# Altium PCB CAN_OD节点V11.PcbDoc
Units mil, origin at the board's own origin, x right, y up, seen from the top; angles counter-clockwise.
Board outline 1045.03 x 910.03 mil, 2 copper layers (Top Layer, Bottom Layer); 34 components, 61 nets, 149 pads, 32 vias.
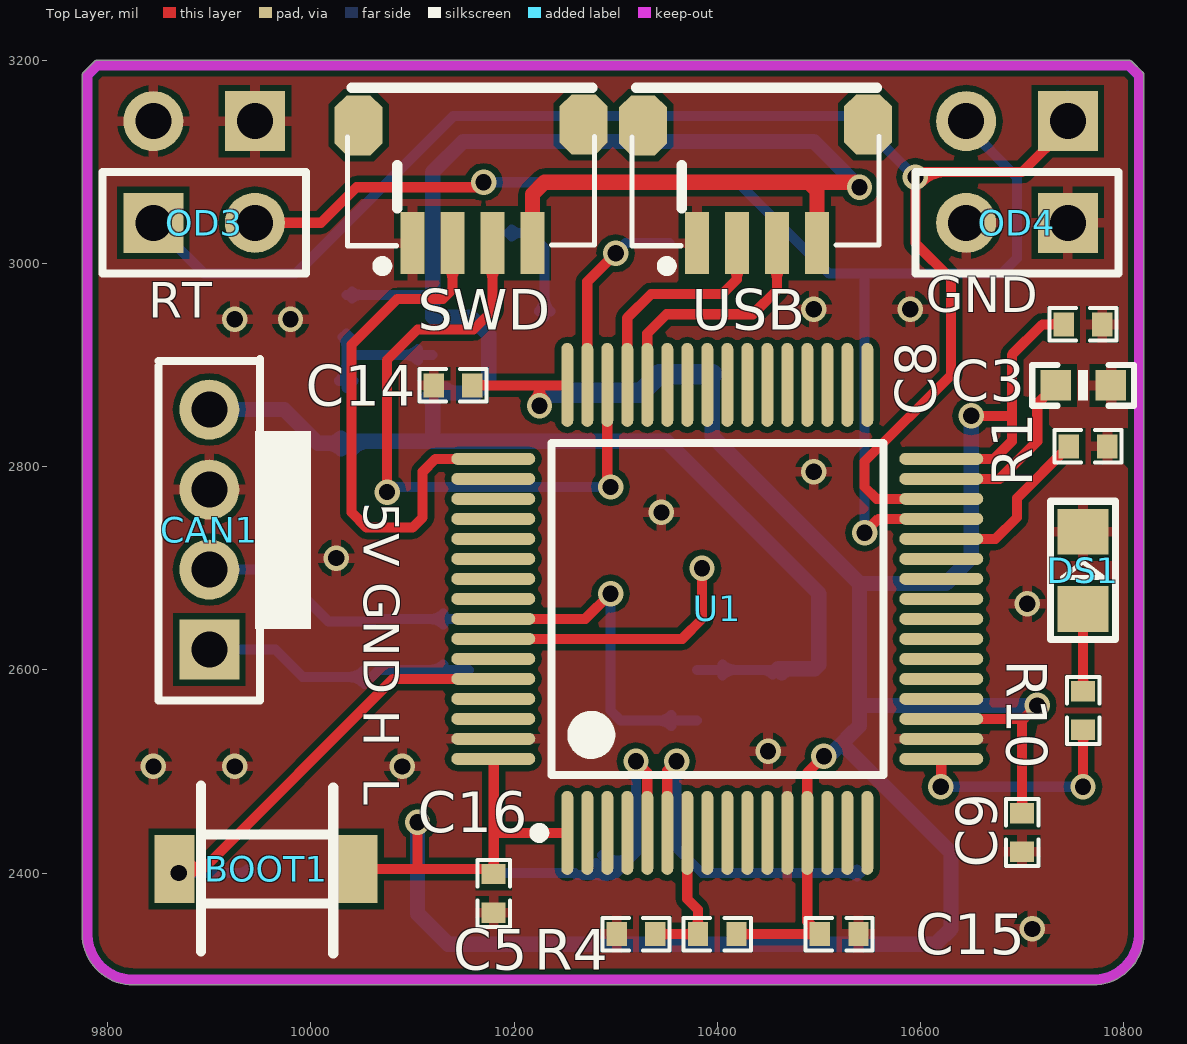
[diagram p0: Top Layer view]
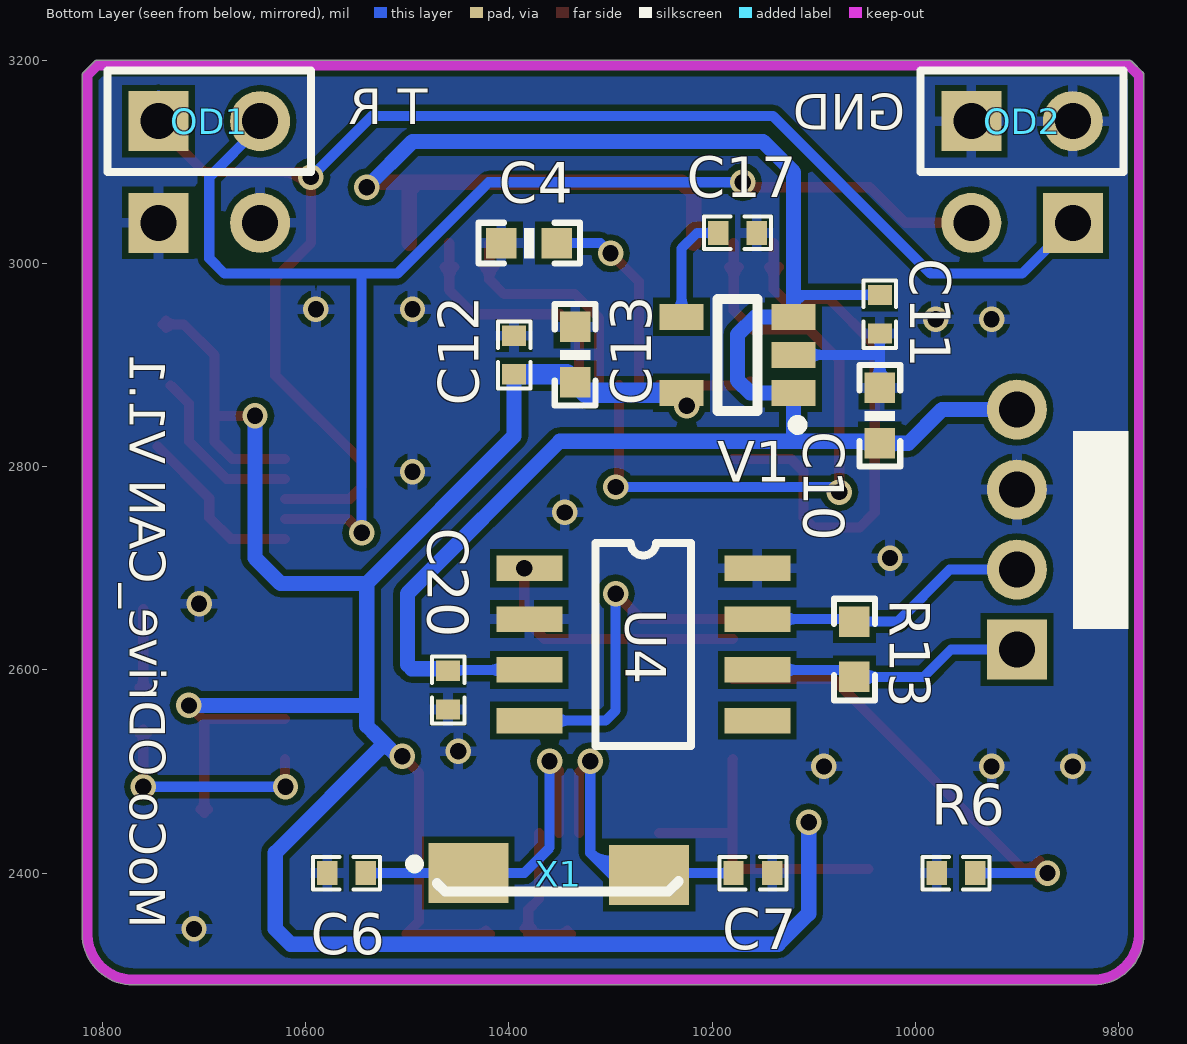
[diagram p1: Bottom Layer view, seen from below]
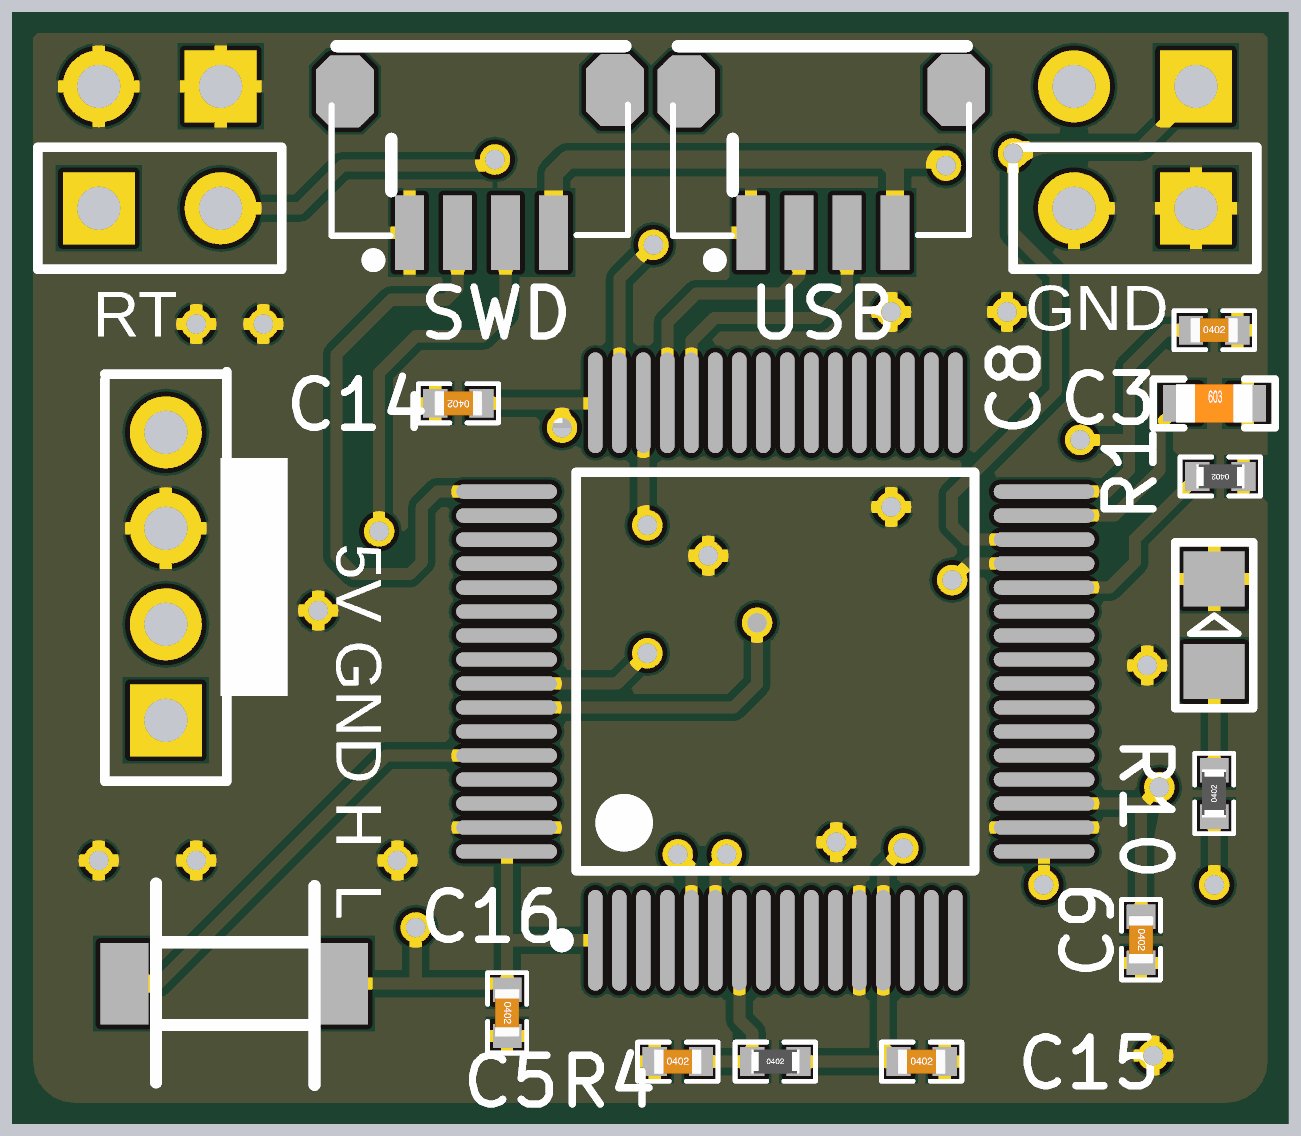
[diagram p2: 3D render of the assembled board from above, using the file's embedded part models]
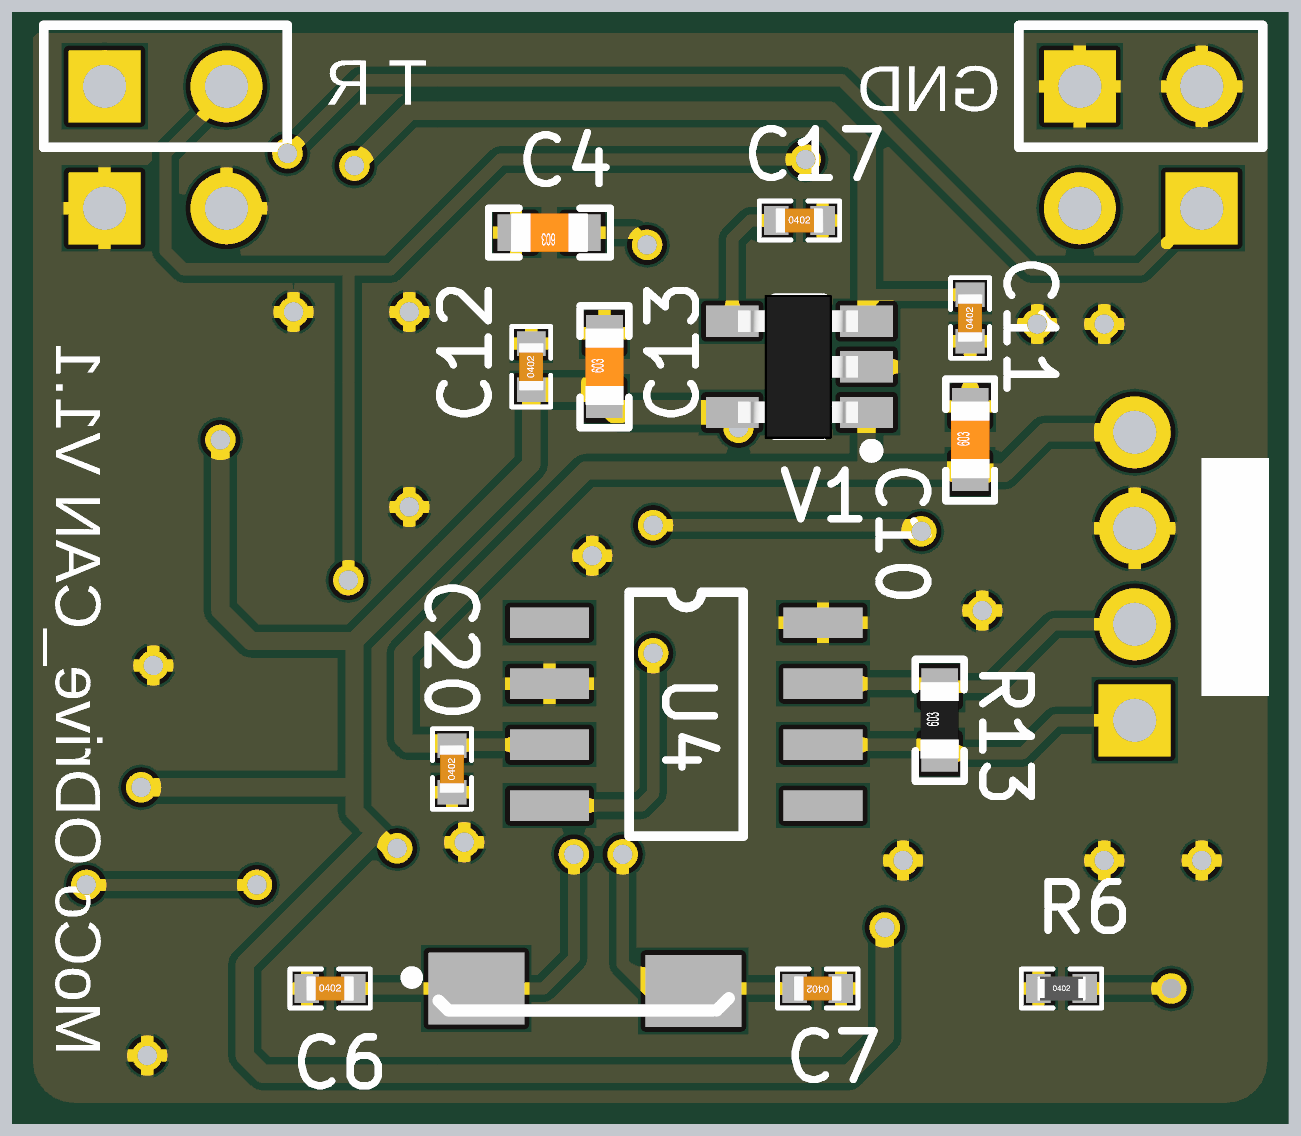
[diagram p3: 3D render of the assembled board from below, using the file's embedded part models]

## Layer stack, top to bottom
Top Layer: signal copper 1.4
Dielectric: dielectric 12.6, FR-4, Dk 4.8
Bottom Layer: signal copper 1.4

## Board outline
9774.99,2340 9774.99,3185 cw(c9780,3185) 9776.47,3188.56 9776.45,3188.55 9786.45,3198.55 9786.44,3198.53 cw(c9790,3195) 9790,3200.01 10805,3200.01 cw(c10805,3195) 10808.56,3198.53 10808.55,3198.55 10818.55,3188.55 10818.53,3188.56 cw(c10815,3185) 10820.01,3185 10820.01,2340 cw(c10770,2340) 10770,2289.99 9825,2289.99 cw(c9825,2340)

## Design rules (kind name [scope] priority, off if disabled: settings)
Clearance [All] p1: gap=6
PolygonConnect [All] p1: connectstyle=Relief reliefconductorwidth=10 reliefentries=4 polygonreliefangle="90 Angle"
RoutingVias [All] p1: holewidth=28 width=50 viastyle="Through Hole" minholewidth=16 minwidth=25 maxholewidth=28 maxwidth=50
SilkscreenOverComponentPads [All] p1: minsilkscreentomaskgap=10
SolderMaskExpansion [All] p1: expansion=4
Width [All] p1: maxlimit=30 minlimit=10 preferedwidth=10 minimp=50.000000 maximp=50.000000 favimp=50.000000
27 further rules are at their usual default settings.

## Components (designator, comment, footprint, x,y, rotation, side; value= is the part's Value field where it differs from the comment)
BOOT1 "Header 2" 663*4*2.0/2.5mm 9920,2420 r0 top
C3 "2.2UF" C0603 10760,2880 r0 top
C4 "2.2UF" C0603 10380,3020 r0 bottom
C5 "10NF" "C 0402" 10320,2340 r0 top
C6 "20PF" "C 0402" 10560,2400 r180 bottom
C7 "20PF" "C 0402" 10160,2400 r0 bottom
C8 "0.1UF" "C 0402" 10760,2940 r0 top
C9 "0.1UF" "C 0402" 10700,2440 r270 top
C10 "10uF" C0603 10035,2850 r90 bottom
C11 "0.1uF" "C 0402" 10035,2950 r90 bottom
C12 "0.1uF" "C 0402" 10395,2910 r90 bottom
C13 "10uF" C0603 10335,2910 r90 bottom
C14 "0.1UF" "C 0402" 10140,2880 r180 top
C15 "0.1UF" "C 0402" 10520,2340 r0 top
C16 "0.1UF" "C 0402" 10180,2380 r270 top
C17 "0.1uF" "C 0402" 10175,3030 r180 bottom
C20 "0.1UF" "C 0402" 10460,2580 r90 bottom
CAN1 "Header 4" PH2.0-4 9900,2620 r90 top
DS1 "LED1" SMDLED 10760,2660 r90 top
OD1 "Header 2" HDR1X2 10745,3140 r180 bottom
OD2 "Header 2" HDR1X2 9945,3140 r180 bottom
OD3 "Header 2" HDR1X2 9845,3040 r0 top
OD4 "Header 2" HDR1X2 10745,3040 r180 top
R1 "10K" "R 0402" 10765,2820 r180 top
R4 "10K" "R 0402" 10400,2340 r0 top
R6 "10K" "R 0402" 9960,2400 r180 bottom
R10 "100R" "R 0402" 10760,2560 r90 top
R13 "120R" R0603 10060,2620 r90 bottom
SWD "Header 4" "SH1.0-4P - up" 10100,3020 r0 top (schematic designator SWD1)
U1 "STM32F405RGT6" LQFP64_M 10400,2660 r90 top
U4 "TJA1050" SOP-8 10380,2700 r180 bottom
USB "Header 4" "SH1.0-4P - up" 10380,3020 r0 top (schematic designator USB_L1)
V1 "RT9193-3.3/LP2985/SPX3819" SOT23-5 10175,2910 r180 bottom
X1 "8MHZ" PXCL 10440,2400 r270 bottom

## Footprints (in the part's own frame and the unit in brackets; to place one, negate y for a bottom-side part, rotate by r counter-clockwise, add the part's x,y. Pads: shape width x height; smd on the part's side, far side on the other; paste and mask are expansions set on the pad)
663*4*2.0/2.5mm [mil] "小龟按键"
  rect 39.37x66.93 smd: 1(126,-16) 2(-54,-16)
  silkscreen extent -28,-99 102,66
C0603 [mil]
  rect 30x30 smd: 1(-27,0) 2(27.5,-0.06)
  silkscreen extent -50,-20 50,20, body extent -31,-16 31,16, height 12
"C 0402" [mil]
  rect 20x23.62 smd: 1(-19,0) 2(19,0)
  silkscreen extent -33,-16 33,16, body extent -20,-10 20,10, height 20
HDR1X2 [mm] "Connector; Header; 2 Position"
  rect 1.5x1.5 hole 0.9: 1(0,0)
  round 1.5 hole 0.9: 2(2.54,0)
  silkscreen extent -1.27,-1.27 3.81,1.27
LQFP64_M [mm] "Thin QFP, 64-Leads, Body 10x10mm, Pitch 0.5mm, IPC Low Density"
  oval 2.1x0.3 smd: 1(-5.6,3.75) 2(-5.6,3.25) 3(-5.6,2.75) 4(-5.6,2.25) 5(-5.6,1.75) 6(-5.6,1.25) 7(-5.6,0.75) 8(-5.6,0.25) 9(-5.6,-0.25) 10(-5.6,-0.75) 11(-5.6,-1.25) 12(-5.6,-1.75) 13(-5.6,-2.25) 14(-5.6,-2.75) 15(-5.6,-3.25) 16(-5.6,-3.75) 33(5.6,-3.75) 34(5.6,-3.25) 35(5.6,-2.75) 36(5.6,-2.25) 37(5.6,-1.75) 38(5.6,-1.25) 39(5.6,-0.75) 40(5.6,-0.25) 41(5.6,0.25) 42(5.6,0.75) 43(5.6,1.25) 44(5.6,1.75) 45(5.6,2.25) 46(5.6,2.75) 47(5.6,3.25) 48(5.6,3.75)
  oval 0.3x2.1 smd: 17(-3.75,-5.6) 18(-3.25,-5.6) 19(-2.75,-5.6) 20(-2.25,-5.6) 21(-1.75,-5.6) 22(-1.25,-5.6) 23(-0.75,-5.6) 24(-0.25,-5.6) 25(0.25,-5.6) 26(0.75,-5.6) 27(1.25,-5.6) 28(1.75,-5.6) 29(2.25,-5.6) 30(2.75,-5.6) 31(3.25,-5.6) 32(3.75,-5.6) 49(3.75,5.6) 50(3.25,5.6) 51(2.75,5.6) 52(2.25,5.6) 53(1.75,5.6) 54(1.25,5.6) 55(0.75,5.6) 56(0.25,5.6) 57(-0.25,5.6) 58(-0.75,5.6) 59(-1.25,5.6) 60(-1.75,5.6) 61(-2.25,5.6) 62(-2.75,5.6) 63(-3.25,5.6) 64(-3.75,5.6)
  silkscreen extent -5.72,-4.15 4.15,4.57, body extent -5,-5 5,5, height 1.6
PH2.0-4 [mm]
  rect 1.5x1.5 hole 0.9: 1(0,0)
  round 1.5 hole 0.9: 2(2,0) 3(4,0) 4(6,0)
  silkscreen extent -1.27,-1.27 7.26,1.27
PXCL [mm]
  rect 1.5x2 smd: 1(0,0) 2(0.051,4.521)
  silkscreen extent -0.34,-1.45 0.46,5.26
R0603 [mil]
  rect 30x30 smd: 1(-27,0) 2(27.5,-0.06)
  silkscreen extent -50,-20 50,20, body extent -31,-16 31,16, height 12
"R 0402" [mil]
  rect 20x23.62 smd: 1(-19,0) 2(19,0)
  silkscreen extent -33,-16 33,16, body extent -20,-10 20,10, height 12
"SH1.0-4P - up" [mm]
  rect 0.6x1.55 smd: 1(0,0) 2(1,0) 3(2,0) 4(3,0)
  oct 1.2x1.5 smd: 1.(4.279,2.972) A(-1.346,2.946)
  silkscreen extent -1.63,-0.7 4.55,3.89
SMDLED [mil]
  rect 45x50 smd: 1(0,0) 2(76.01,0)
  silkscreen extent -30,-32 106,32
SOP-8 [mil]
  rect 65x25 smd: 1(0,0) 2(0,-50) 3(0,-100) 4(0,-150) 5(224.41,-150) 6(224.41,-100) 7(224.41,-50) 8(224.41,0)
  silkscreen extent 65,-175 159,25
SOT23-5 [mm]
  rect 1.1x0.65 smd: 1(1.4,-0.95) 2(1.4,0) 3(1.4,0.95) 4(-1.4,0.95) 5(-1.4,-0.95)
  silkscreen extent -0.5,-1.87 1.62,1.4, body extent -1.28,-1.5 1.22,1.5, height 1.05

## Part data
BOOT1 OD1 OD2 OD3 OD4: "Header, 2-Pin"
C3 C4: library part CAP1, "胆电容"
C5 C8 C9 C10 C12 C13 C14 C15 C16 C20: library part CAP, "Capacitor"
C6 C7: library part C2, "0805"
C11 C17: library part Capacitor, "普通电容"
CAN1 SWD USB: "Header, 4-Pin"
DS1: library part LED2, "Typical RED, GREEN, YELLOW, AMBER GaAs LED"
R1 R4 R6 R10 R13: library part Res2, "0603"
U4: library part SN65HVD230D
V1: "降压IC"
X1: library part XTAL, "Crystal Oscillator"

## Via types
v1: diameter 25, hole 16, Top Layer to Bottom Layer, 32 vias

## Nets (pads, with @x,y where several pads share a name; then routed paths per layer and width w, separated by ;. In a path a pad name is that pad's centre, name@x,y a point inside that pad or via, vN(x,y) a via of type N, cw(c..) or ccw(c..) an arc to the next point about the centre after c; other vN are vias at no path point)
3.3V: BOOT1.1 C8.1 C9.1 C12.1 C13.1 C14.1 C15.1 C16.1 R4.2 U1.1 U1.13 U1.19 U1.32 U1.48 U1.64 V1.5 | length 3281.5
  Top Layer w10: BOOT1.1 10105,2404 ; v1(10105,2450) 10105,2404 ; C14.1 10225,2880 ; C14.1@10162.54,2876.46 cw(c10171.07,2867.93) 10171.07,2880 cw(c10171.07,2892.07) C14.1@10162.54,2883.54 ; C16.1@10176.46,2402.54 ccw(c10167.93,2411.07) 10180,2411.07 ccw(c10192.07,2411.07) C16.1@10183.54,2402.54 ; U1.64 10180,2511.89 10180,2440 ; v1@10219.7,2865.3 ccw(c10206.89,2878.11) 10225,2878.11 ccw(c10243.11,2878.11) v1@10230.3,2865.3 ; v1(10225,2860) 10225,2880 ; U1.1 10180.47,2439.53 10180,2440 ; U1.48 10251.89,2880 10225,2880 ; R4.2 C15.1 10488.58,2352.42 U1.13 10488.58,2498.58 v1(10505,2515) ; R4.2@10422.54,2336.46 cw(c10431.07,2327.93) 10431.07,2340 cw(c10431.07,2352.07) R4.2@10422.54,2343.54 ; C15.1@10497.46,2336.46 ccw(c10488.93,2327.93) 10488.93,2340 ccw(c10488.93,2352.07) C15.1@10497.46,2343.54 ; U1.19 10701.73,2551.73 ; U1.32 10672.64,2807.64 10690,2825 10690,2850 ; v1(10650,2850) 10690,2850 ; C9.1@10696.46,2462.54 ccw(c10687.93,2471.07) 10700,2471.07 ccw(c10712.07,2471.07) C9.1@10703.54,2462.54 ; C9.1 10700,2550 10701.73,2551.73 ; v1(10715,2565) 10701.73,2551.73 ; C8.1@10737.46,2936.46 ccw(c10728.93,2927.93) 10728.93,2940 ccw(c10728.93,2952.07) C8.1@10737.46,2943.54 ; C8.1 10720,2940 10690,2910 10690,2850 ; 10105,2404 10175,2404 C16.1 10180,2440
  Bottom Layer w10: v1(10225,2860) V1.5@10225,2867.48
  Bottom Layer w15: v1(10105,2450) 10105,2360 10135,2330 10615,2330 10630,2345 10630,2420 10522.5,2527.5 ; C12.1 10395,2830 10540,2685 ; v1(10505,2515) 10510,2515 10522.5,2527.5 ; 10530.22,2534.78 10530.22,2535.22 ; v1(10650,2850) 10650,2710 10625,2685 10540,2685 ; v1(10715,2565) 10540,2565 ; 10522.5,2527.5 10530.22,2535.22 ; 10530.22,2535.22 10540,2545 10540,2565 ; 10540,2565 10540,2685
  Bottom Layer w20: V1.5 10324.6,2872.6 10343,2891 C12.1
5V: C10.1 C11.2 C20.2 CAN1.4 SWD.4 U4.3 USB.4 V1.1 V1.3 | length 2352
  Top Layer w15: SWD.4 10218.11,3068.11 10230,3080 10490,3080 ; USB.4 10498.11,3071.89 10490,3080 ; v1(10540,3075) 10535,3080 10490,3080
  Bottom Layer w10: C11.2 10111,2969 10119.88,2960.12 V1.3 ; C11.2@10040.35,2965.46 cw(c10048.88,2956.93) 10048.88,2969 cw(c10048.88,2981.07) C11.2@10040.35,2972.54 ; U4.3 10459,2600 C20.2@10460,2601 ; U4.3@10405.3,2594.7 cw(c10418.11,2581.89) 10418.11,2600 cw(c10418.11,2618.11) U4.3@10405.3,2605.3 ; 10443.7,2600 cw(c10443.7,2584.51) C20.2@10454.65,2595.46
  Bottom Layer w15: CAN1.4 9973.78,2856.22 10007,2823 C10.1 10037,2825 10120,2825 ; C10.1@10029.7,2817.7 ccw(c10016.89,2804.89) 10016.89,2823 ccw(c10016.89,2841.11) C10.1@10029.7,2828.3 ; C10.1@10040.3,2817.7 cw(c10057.93,2800.07) 10057.93,2825 ; V1.1@10116.14,2868.85 cw(c10106.81,2859.53) 10120,2859.53 ; V1.1 V1.1@10120,2872.48 ; V1.1@10132.48,2876.34 ccw(c10141.81,2885.67) 10141.81,2872.48 ; C20.2@10460,2601 10496,2601 ; C20.2@10463.58,2597.23 cw(c10472.67,2588.14) 10472.67,2601 ; 10500,2605 10500,2675 10350,2825 10120,2825 ; v1(10540,3075) 10495,3120 10150,3120 10119.88,3089.88 V1.3 10157.6,2947.4 10175,2930 10175,2885 10162.48,2872.48 V1.1@10120,2872.48 ; 10120,2825 V1.1@10120,2872.48
BAT: U1.20
BEEP: U1.59
CAN_RX1: U1.61
CAN_RX2: U1.57 U4.4 | length 358.3
  Top Layer w10: U1.57 10270.16,2650.16 v1(10295,2675)
  Bottom Layer w10: v1(10295,2675) 10295,2560 10305,2550 U4.4 ; U4.4@10354.7,2544.7 ccw(c10341.89,2531.89) 10341.89,2550 ccw(c10341.89,2568.11) U4.4@10354.7,2555.3
CAN_TX1: U1.62
CAN_TX2: U1.58 U4.1 | length 263.6
  Top Layer w10: U1.58 10365.47,2630.47 10385,2650 v1(10385,2700)
CS_BARO: U1.33
CS_FLASH: U1.41
CS_HML: U1.50
CS_IMU: U1.21
CS_NRF: U1.24
DM: U1.44 USB.3 | length 268
  Top Layer w10: U1.44 10331.1,2931.1 10350,2950 10435,2950 10458.74,2973.74 USB.3 ; USB.3@10453.92,2996.48 cw(c10442.3,2984.86) 10458.74,2984.86 cw(c10475.18,2984.86) USB.3@10463.56,2996.48
DP: U1.45 USB.2 | length 251.1
  Top Layer w10: U1.45 10311.42,2946.42 10335,2970 10405,2970 10419.37,2984.37 USB.2 ; USB.2@10414.55,2996.48 cw(c10402.93,2984.86) 10419.37,2984.86 cw(c10435.81,2984.86) USB.2@10424.19,2996.48
EN_POWER: U1.25
GND: C3.2 C4.2 C5.1 C6.1 C7.1 C8.2 C9.2 C10.2 C11.1 C12.2 C13.2 C14.2 C15.2 C16.2 C17.2 C20.1 CAN1.3 DS1.2 OD2.1 OD2.2 OD4.1 OD4.2 R1.1 R6.1 SWD.1 U1.12 U1.18 U1.63 U4.2 U4.8 USB.1 V1.2 | length 224.9
  Bottom Layer w10: C10.2@10027.86,2884.57 ccw(c10010.64,2901.8) 10035,2901.8 ; C11.1@10031.46,2927.46 cw(c10022.93,2918.93) 10035,2918.93 cw(c10047.07,2918.93) C11.1@10038.54,2927.46 ; C10.2 10035,2877.56 C11.1 ; 10035,2901.49 ccw(c10058.92,2901.49) C10.2@10042.01,2884.57 ; 10035,2910 V1.2 ; V1.2@10105.51,2904.49 ccw(c10092.2,2891.18) 10092.2,2910 ccw(c10092.2,2928.82) V1.2@10105.51,2915.51
  other v1: 10710,2345 9845,2505 9925,2505 10090,2505 10450,2520 10705,2665 10025,2710 10345,2755 10495,2795 9925,2945 9980,2945 10495,2955 10590,2955
GROUND1: U1.8
GROUND2: U1.9
GROUND3: U1.10
GROUND4: U1.11
LED1: R10.1 U1.17 | length 242.5
  Top Layer w10: v1(10620,2485) 10620.47,2485.47 U1.17 ; R10.1@10756.46,2537.46 cw(c10747.93,2528.93) 10760,2528.93 cw(c10772.07,2528.93) R10.1@10763.54,2537.46 ; v1(10760,2485) R10.1
  Bottom Layer w10: v1(10620,2485) v1(10760,2485)
LED2: U1.56
NetBOOT1_2: BOOT1.2 R6.2 U1.60 | length 544.8
  Top Layer w10: v1(9870,2400) BOOT1.2 9894,2404 ; BOOT1.2@9875.85,2395.3 cw(c9894,2380.71) 9894,2404 ; BOOT1.2@9878.08,2395.65 cw(c9894,2384.65) 9894,2404 ; BOOT1.2@9878.08,2412.35 ccw(c9894,2423.35) 9894,2404 ; U1.60 10081.1,2591.1 9894,2404
  Bottom Layer w10: v1(9870,2400) R6.2 ; R6.2@9937.46,2396.46 ccw(c9928.93,2387.93) 9928.93,2400 ccw(c9928.93,2412.07) R6.2@9937.46,2403.54
NetC3_1: C3.1 U1.31 | length 172.3
  Top Layer w10: U1.31 10677.95,2787.95 10715,2825 10715,2862 C3.1
NetC4_1: C4.1 U1.47 | length 198.2
  Top Layer w10: U1.47 10272.05,2982.05 v1(10300,3010)
  Bottom Layer w10: v1(10300,3010) 10310,3020 C4.1
NetC5_2: C5.2 R4.1 U1.7 | length 202.8
  Top Layer w10: C5.2 R4.1 10381,2364 10370.47,2374.53 U1.7 ; C5.2@10342.54,2336.46 cw(c10351.07,2327.93) 10351.07,2340 cw(c10351.07,2352.07) C5.2@10342.54,2343.54 ; R4.1@10377.46,2336.46 ccw(c10368.93,2327.93) 10368.93,2340 ccw(c10368.93,2352.07) R4.1@10377.46,2343.54 ; R4.1@10377.46,2345.35 ccw(c10368.93,2353.88) 10381,2353.88 ccw(c10393.07,2353.88) R4.1@10384.54,2345.35
NetC6_2: C6.2 U1.6 X1.1 | length 369.6
  Top Layer w10: U1.6 10350.79,2500.79 v1(10360,2510)
  Bottom Layer w10: v1(10360,2510) 10360,2425 10385,2400 X1.1 C6.2 ; C6.2@10537.46,2396.46 ccw(c10528.93,2387.93) 10528.93,2400 ccw(c10528.93,2412.07) C6.2@10537.46,2403.54
NetC7_2: C7.2 U1.5 X1.2 | length 437.6
  Top Layer w10: v1(10320,2510) 10331.1,2498.9 U1.5
  Bottom Layer w10: C7.2 10260,2400 X1.2 10298,2398 10320,2420 ; C7.2@10182.54,2396.46 cw(c10191.07,2387.93) 10191.07,2400 cw(c10191.07,2412.07) C7.2@10182.54,2403.54 ; X1.2@10274.56,2401.62 ccw(c10287.93,2419.45) 10303.69,2403.69 ; X1.2@10280.56,2409.62 ccw(c10294.92,2428.77) 10311.85,2411.85 ; X1.2@10286.56,2417.62 ccw(c10301.91,2438.09) 10320,2420 ; v1(10320,2510) 10320,2420
NetC17_1: C17.1 V1.4 | length 158.4
  Bottom Layer w10: C17.1 10215,3030 10230.12,3014.88 V1.4 ; C17.1@10197.54,3026.46 cw(c10206.07,3017.93) 10206.07,3030 cw(c10206.07,3042.07) C17.1@10197.54,3033.54 ; V1.4@10224.61,2952.91 ccw(c10211.3,2966.22) 10230.12,2966.22 ccw(c10248.94,2966.22) V1.4@10235.63,2952.91
NetCAN1_2: CAN1.1 R13.1 U4.6 | length 356.3
  Bottom Layer w10: CAN1.1 9965,2620 9992,2593 R13.1 ; R13.1@10052.69,2586.18 ccw(c10037,2571.55) 10037,2593 ; R13.1@10052.69,2599.82 cw(c10037,2614.45) 10037,2593 ; U4.6@10130.29,2594.7 ccw(c10117.48,2581.89) 10117.48,2600 ccw(c10117.48,2618.11) U4.6@10130.29,2605.3 ; U4.6 10067,2600 R13.1 ; 10037,2593 R13.1
NetCAN1_3: CAN1.2 R13.2 U4.7 | length 336.2
  Bottom Layer w10: CAN1.2 9966.26,2698.74 10017.5,2647.5 R13.2 ; 10029.98,2647.5 R13.2 ; U4.7@10130.29,2644.7 ccw(c10117.48,2631.89) 10117.48,2650 ccw(c10117.48,2668.11) U4.7@10130.29,2655.3 ; U4.7 10062.44,2650 R13.2
NetDS1_1: DS1.1 R10.2 | length 100
  Top Layer w10: R10.2@10756.46,2582.54 ccw(c10747.93,2591.07) 10760,2591.07 ccw(c10772.07,2591.07) R10.2@10763.54,2582.54 ; R10.2 DS1.1
NetR1_2: R1.2 U1.28 | length 174.4
  Top Layer w10: U1.28 10673.9,2728.9 10695,2750 10695,2769 R1.2
NRF_CE: U1.2
PWM1: U1.14
PWM2: U1.15
PWM3: U1.16
PWM5: U1.22
PWM6: U1.23
PWM7: U1.26
PWM8: U1.27
PWM9: U1.37
PWM10: U1.38
PWM11: U1.39
PWM12: U1.40
SBUS: U1.54
SCL_B: U1.3
SCLK_FC: SWD.2 U1.49 | length 558.5
  Top Layer w10: SWD.2@10134.55,2996.48 cw(c10122.93,2984.86) 10139.37,2984.86 cw(c10155.81,2984.86) SWD.2@10144.19,2996.48 ; SWD.2 10139.37,2974.37 10130,2965 10085,2965 10040,2920 10040,2755 10055,2740 10100,2740 10110,2750 10110,2795 10122.64,2807.64 U1.49
SDA_B: U1.4
SPI2_CK: U1.34
SPI2_SI: U1.36
SPI2_SO: U1.35
SPI3_CK: U1.51
SPI3_SI: U1.53
SPI3_SO: U1.52
SWD_FC: SWD.3 U1.46 | length 669.9
  Top Layer w10: v1(10075,2775) 10075,2905 10105,2935 10160,2935 10178.74,2953.74 SWD.3 ; SWD.3@10173.92,2996.48 cw(c10162.3,2984.86) 10178.74,2984.86 cw(c10195.18,2984.86) SWD.3@10183.56,2996.48 ; U1.46 10291.73,2783.27 v1(10295,2780)
  Bottom Layer w10: v1(10075,2775) 10080,2780 v1(10295,2780)
UART1_R_1: U1.43
UART1_T_1: U1.42
UART3_R_1: OD1.1 OD3.1 U1.30 | length 1523.1
  Top Layer w10: v1@10600.3,3079.7 cw(c10625.18,3054.82) 10625.18,3090 ; U1.30 10556.73,2768.27 10545,2780 10545,2805 10630,2890 10630,2985 10595,3020 v1(10595,3085) 10600,3090 10700,3090 OD1.1@10745,3135
  Bottom Layer w10: OD3.1 9895,2990 9985,2990 10140,3145 10535,3145 v1(10595,3085) ; OD1.1@10745,3135 OD1.1@10745,3165
UART3_T_1: OD1.2 OD3.2 U1.29 | length 1289.8
  Top Layer w10: OD3.2 10010,3040 10045,3075 v1@10165,3075 ; v1(10545,2735) 10558.58,2748.58 U1.29
  Bottom Layer w10: v1(10170,3080) 10420,3080 10510,2990 10545,2990 ; v1(10545,2735) 10545,2990 ; OD1.2@10645,3135 10695,3085 10695,3005 10680,2990 10545,2990
pads on no net: SWD.1. SWD.A U1.55 U4.5 USB.1. USB.A

## Polygon pours and split planes (outlines as drawn)
GND on Top Layer "Top Layer-No Net" (solid, remove dead copper, pour order 1000): 9756.91,3196.92 9771.91,3181.92 9771.91,2221.92 10796.91,2221.92 10831.91,2256.92 10861.91,2286.92 10861.91,3191.92
GND on Bottom Layer "Top Layer-No Net" (solid, remove dead copper, pour order 1001): 9714.81,3228.85 9714.81,2258.85 9749.81,2223.85 9759.81,2213.85 10829.81,2213.85 10829.81,3193.85 10834.81,3198.85

## Keep-outs
Keep-Out Layer:
  lines w10: 9780,3155 9780,3185 9790,3195 10805,3195 10815,3185 10815,2340 cw(c10770,2340) 10770,2295 9825,2295 cw(c9825,2340) 9780,2340 9780,3175

## Silkscreen, mask and mechanical layers (free items; w line width, h text height)
Top Overlay:
  rectangle: 9945,2640 10000,2835
  text "GND" at 10605,2940 h60
  text "RT" at 9840,2935 h60
  text "5V GND H  L" at 10040,2765 h60 r270
Bottom Overlay:
  rectangle: 9790,2640 9845,2835
  text "T R" at 10480,3125 h60
  text "GND" at 10010,3120 h60
  text "MoCo ODrive_CAN V1.1" at 10785,2345 h60 r90